# EAGLE board module2.0 (EAGLE 9.2.2)
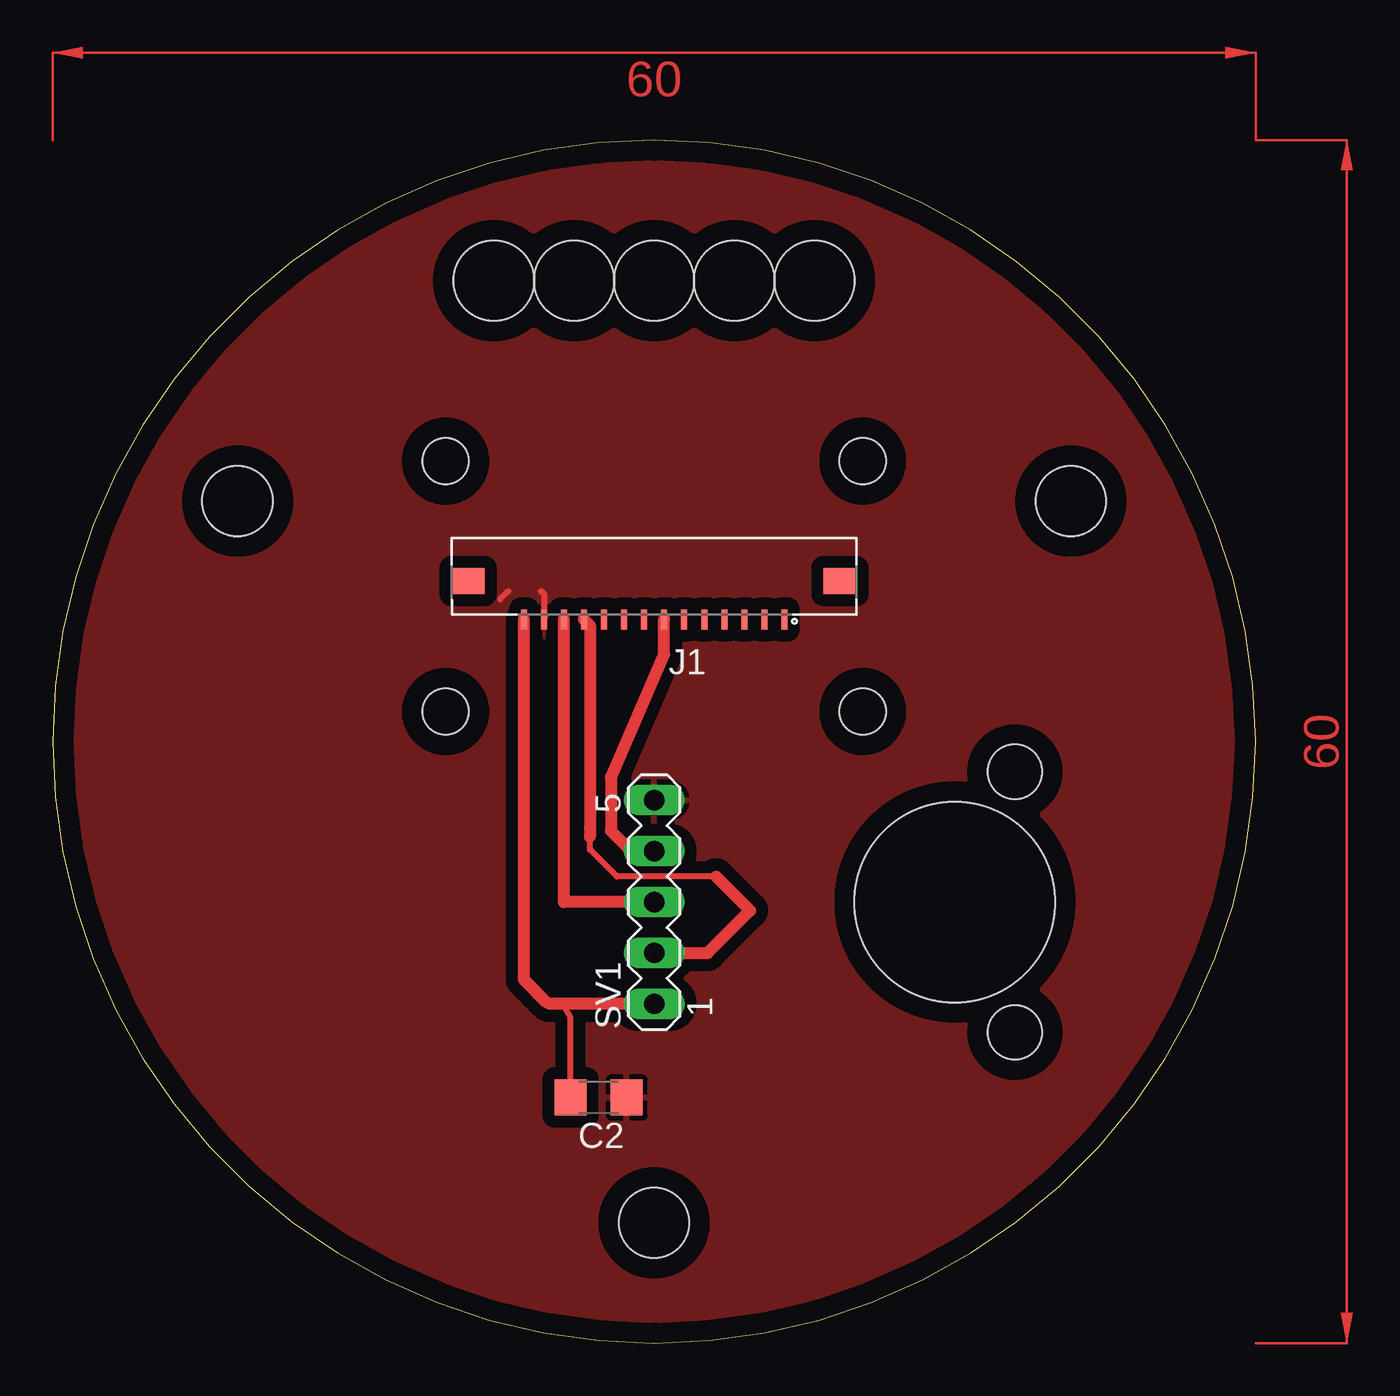
[diagram p0: board, top side]

Size 60 x 60 mm. Coordinates in mm from the lower left corner, seen from the top.
Outline: 0,30 arc90 30,0 arc90 60,30 arc90 30,60 arc90 0,30
Copper layers (1*16): Top 0.035mm / dielectric 1.5mm / Bottom 0.035mm
Design rules "default": minimum track width 6mil, minimum drill 0.35mm, track to track 6mil, track to pad 6mil, pad to pad 6mil, via to via 6mil, smd to smd 6mil, copper to edge 40mil, drill to drill 6mil, minimum pad ring 10mil, minimum via ring 8mil, stop-mask expansion 4mil, vias tented up to drill 0mil, thermal gap 10mil
Holes 2.7 mm at 48,28.5 48,15.5
Holes 10 mm at 45,22
Holes 3.5 mm at 30,6 50.78,42 9.22,42
Holes 4 mm at 30,53 34,53 38,53 26,53 22,53
Holes 2.3 mm at 19.6,44 40.4,44 19.6,31.5 40.4,31.5

## Footprints (pad centres in the part's own frame; a part is rotated, then mirrored left to right if it is on the bottom)
C1206 = smd 1.6 x 1.8: 1 -1.4,0; 2 1.4,0
686114183522 = smd 0.3 x 1: 1 -6.5,1.9; 2 -5.5,1.9; 3 -4.5,1.9; 4 -3.5,1.9; 5 -2.5,1.9; 6 -1.5,1.9; 7 -0.5,1.9; 8 0.5,1.9; 9 1.5,1.9; 10 2.5,1.9; 11 3.5,1.9; 12 4.5,1.9; 13 5.5,1.9; 14 6.5,1.9 | smd 1.65 x 1.3: Z1 -9.275,0; Z2 9.275,0
MA05-1 = drill 1.016 long: 1 -5.08,0; 2 -2.54,0; 3 0,0; 4 2.54,0; 5 5.08,0

## Placement (x,y rotation side)
C2  100nF  [C1206]  27.23,12.25 180 top
J1  [686114183522]  30,38 180 top
SV1  [MA05-1]  30,22 90 top

## Library data of the parts
C2 = eagle-ltspice; SPICEMODEL: NONE; SPICEPREFIX: C
J1 = Wurth_Elektronik_Electromechanic_FPC_Connectors_&_Flat_Flexible_Cable_rev18c
SV1 = con-lstb; OC_FARNELL: unknown; OC_NEWARK: unknown

## Nets
GND: C2.1 J1.13 SV1.5
INT: J1.7 SV1.4
S$1: C2.2
SCL: J1.12 SV1.3
SDA: J1.11 SV1.2
VCC: J1.14 SV1.1

## Tracks (layer width: path | path; a pad name or v marks a point on that pad's centre or on a via)
GND
  Top 0.305: 22.32,37.1 22.73,37.51 | 24.35,37.51 24.5,37.37 24.5,36.32 24.57,36.24
  pour Top (isolate 0.61): 0.13,62.67 0.13,0.08 0.31,-0.1 58.2,-0.1 66.45,8.15 66.45,37.74 41.63,62.56
INT
  Top 0.61: J1.7 30.5,34.36 27.85,28.23 27.85,25.55 28.86,24.54 SV1.4
S$1
  Top 0.305: C2.2 25.83,16.26 25.44,16.92
SCL
  Top 0.61: SV1.3 25.5,22 J1.12
SDA
  Top 0.305: 33.09,23.27 28.15,23.27 26.8,24.62 26.8,25.73
  Top 0.61: SV1.2 32.67,19.46 34.78,21.57 33.09,23.27 | J1.11 26.8,35.8 26.8,25.73 26.8,25.26
VCC
  Top 0.61: SV1.1 24.77,16.92 24.67,16.97 23.5,18.14 J1.14
(copper drawn outside any net)
  shapes: Top area x2